# EAGLE board GrapherBlank2 (EAGLE 5.10)
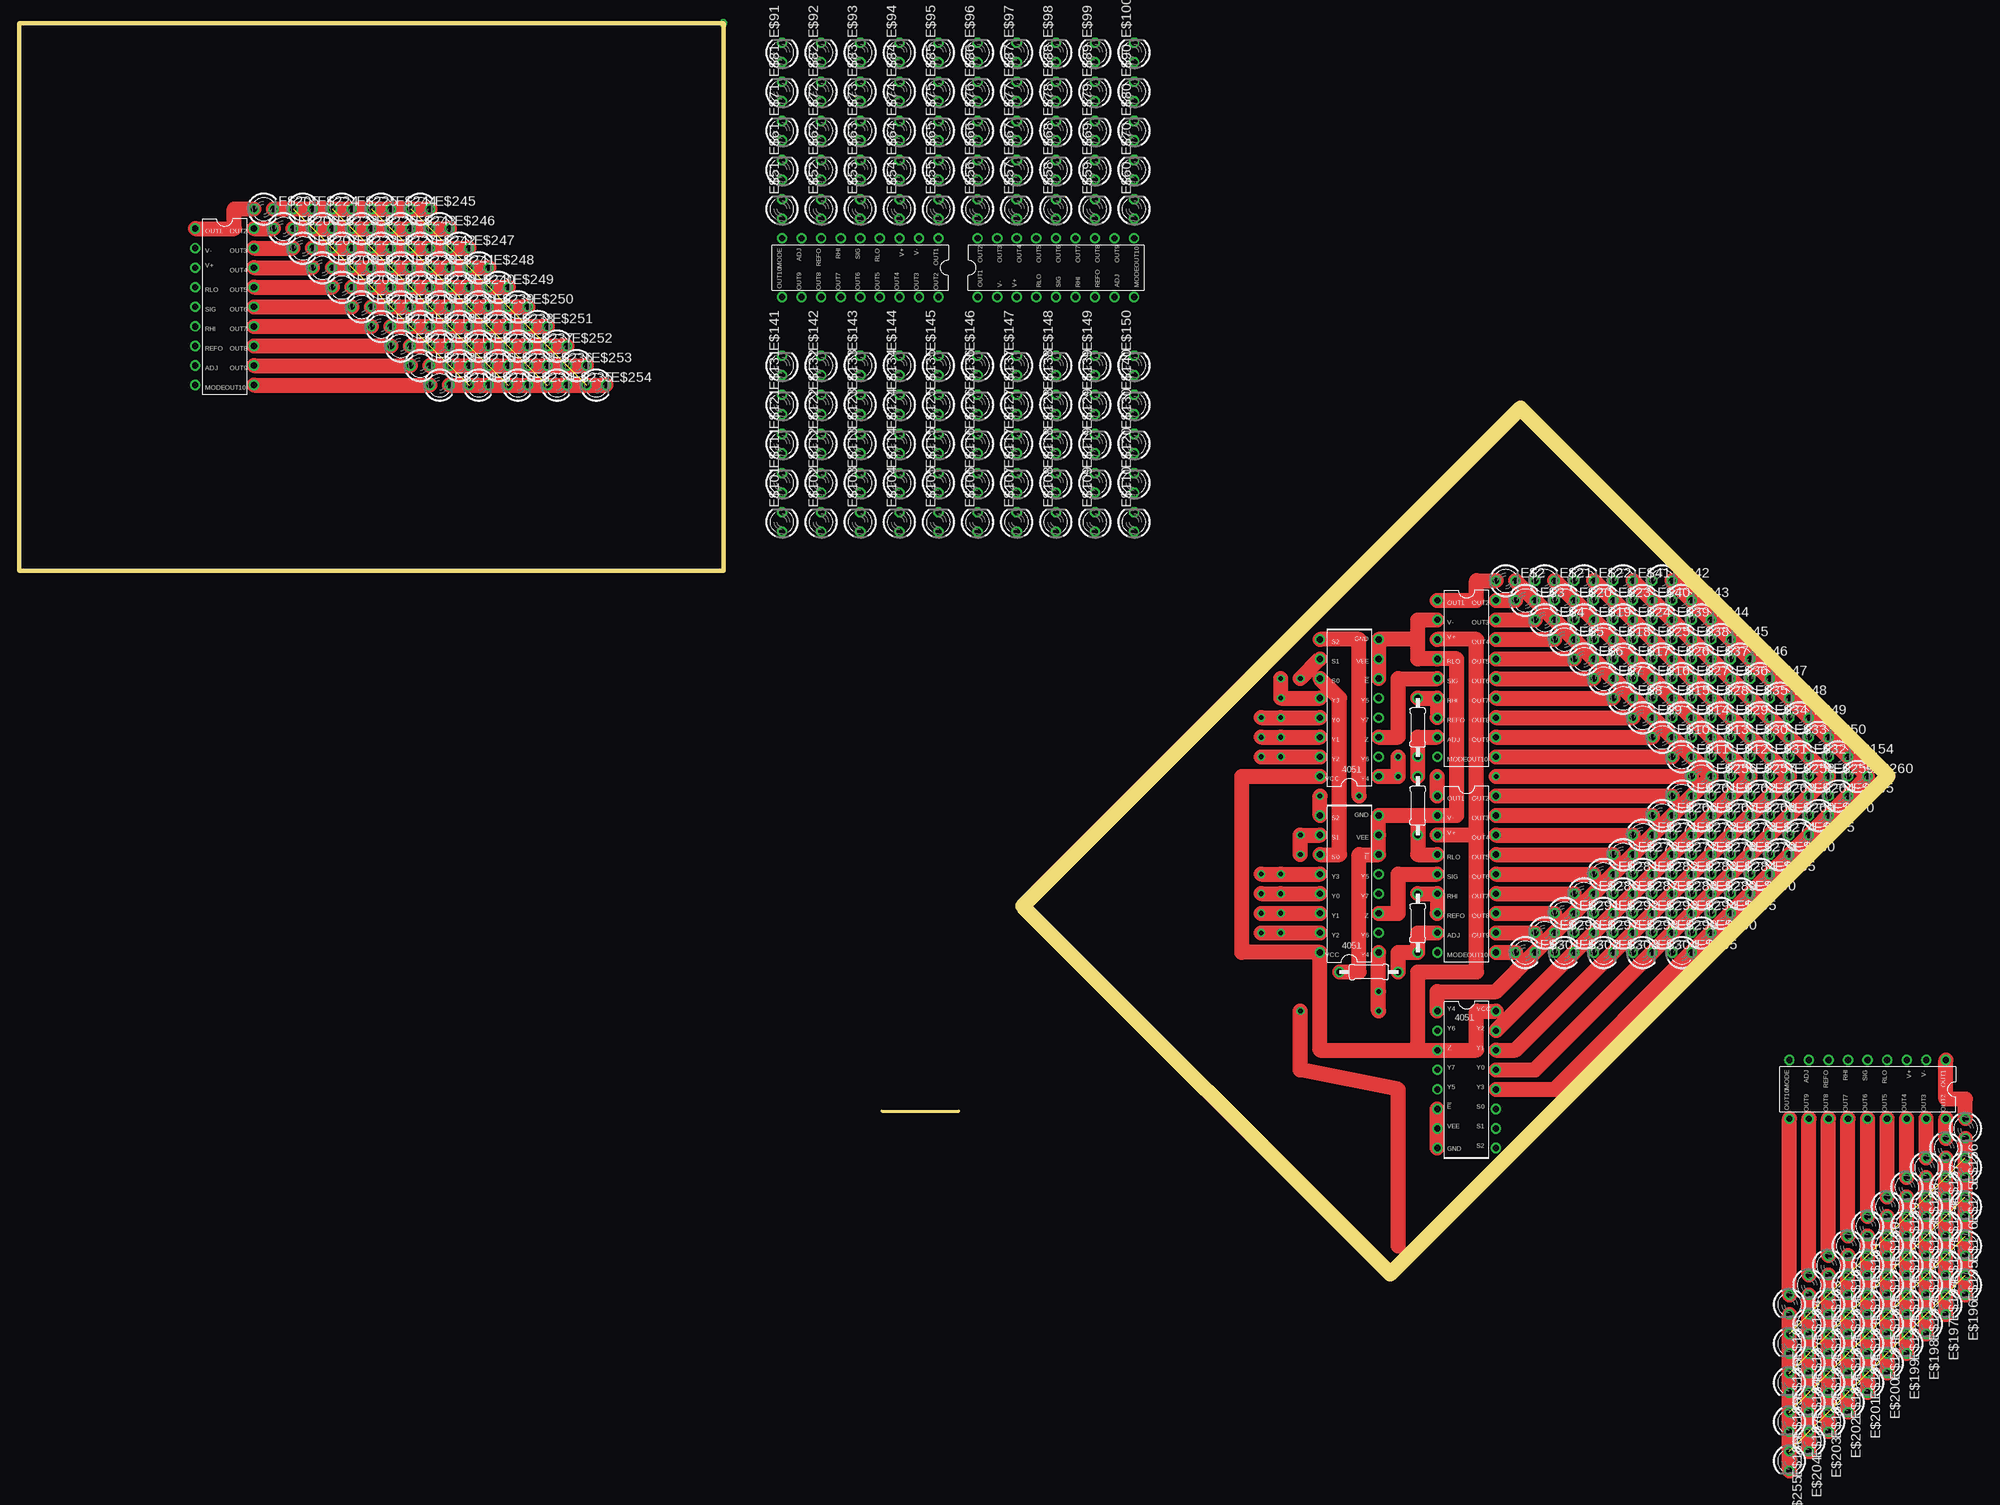
[diagram p0: board, top side]
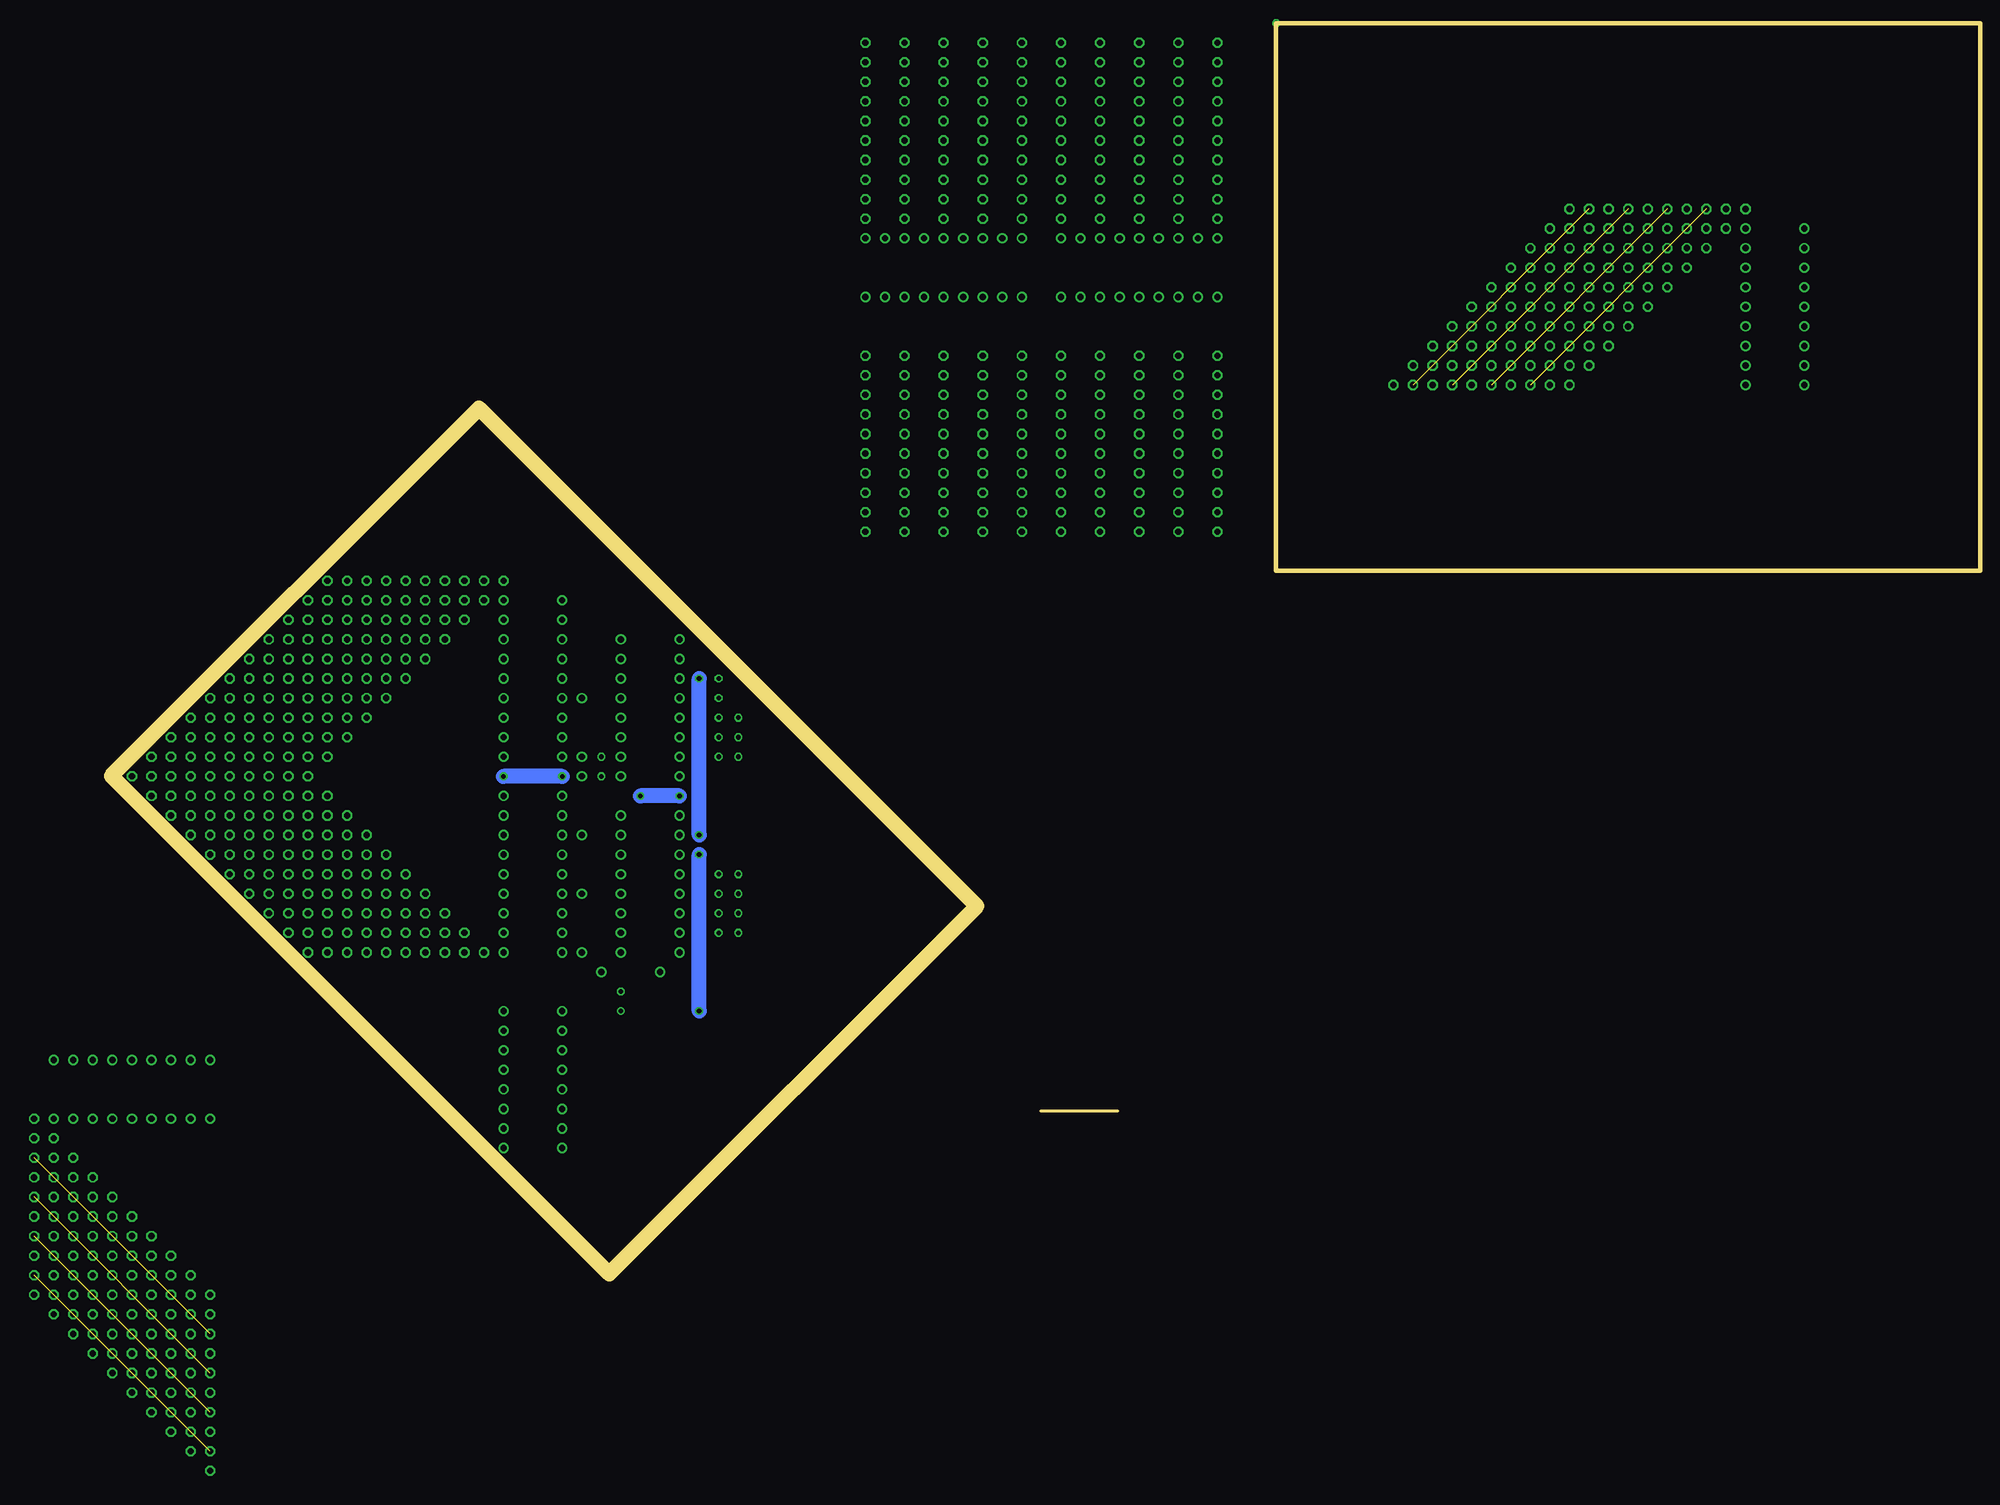
[diagram p1: board, bottom side, seen from below]

Size 242.7 x 162.38 mm. Coordinates in mm from the lower left corner, seen from the top.
Outline: 91.44,91.26 91.44,162.38 0,162.38 0,91.26 91.44,91.26
Outline: 242.7,64.66 194.95,112.41 130.29,47.75 178.04,0 242.7,64.66
Copper layers (1*16): Top 0.035mm / dielectric 1.5mm / Bottom 0.035mm
Design rules "default": minimum track width 10mil, minimum drill 24mil, track to track 8mil, track to pad 8mil, pad to pad 8mil, via to via 8mil, smd to smd 8mil, copper to edge 40mil, drill to drill 8mil, minimum pad ring 10mil, minimum via ring 8mil, stop-mask expansion 4mil, vias tented up to drill 0mil, thermal gap 10mil
Milling: 1 lines

## Footprints (pad centres in the part's own frame; a part is rotated, then mirrored left to right if it is on the bottom)
LM3914-10LED-BARGRAPH = drill 0.813 round: 1!R -3.81,1.27; 1!S -3.81,3.81; 1Q 3.81,1.27; 2!R -3.81,-3.81; 2!S -3.81,-6.35; 2Q 3.81,-8.89; 2Q1 3.81,-11.43; 2Q3 -3.81,-11.43; 3!R 3.81,-1.27; 3!S 3.81,-3.81; 3Q 3.81,-6.35; 4!R 3.81,3.81; 4!S 3.81,6.35; 4Q -3.81,8.89; GND -3.81,-8.89; NC -3.81,6.35; OE -3.81,-1.27; VCC 3.81,8.89
LED3MM = drill 0.813 octagon: A -1.27,0; K 1.27,0
4051-ANALOG-MUX = drill 0.813 round: CLOCK 3.81,-6.35; GND -3.81,-8.89; Q0 3.81,-8.89; Q1 -3.81,-6.35; Q2 -3.81,-3.81; Q3 -3.81,-1.27; Q4 -3.81,3.81; Q5 -3.81,6.35; Q6 -3.81,1.27; Q7 3.81,1.27; Q8 3.81,-1.27; Q9 3.81,3.81; Q10 3.81,6.35; Q11 -3.81,8.89; RESET 3.81,-3.81; VCC 3.81,8.89
RESISTOR = drill 0.813 round: IN1 -3.81,0; IN2 3.81,0

## Placement (x,y rotation side)
E$1  [LM3914-10LED-BARGRAPH]  187.96,78.56 0 top
E$2  [LED3MM]  193.04,89.99 0 top
E$3  [LED3MM]  195.58,87.45 0 top
E$4  [LED3MM]  198.12,84.91 0 top
E$5  [LED3MM]  200.66,82.37 0 top
E$6  [LED3MM]  203.2,79.83 0 top
E$7  [LED3MM]  205.74,77.29 0 top
E$8  [LED3MM]  208.28,74.75 0 top
E$9  [LED3MM]  210.82,72.21 0 top
E$10  [LED3MM]  213.36,69.67 0 top
E$11  [LED3MM]  215.9,67.13 0 top
E$12  [LED3MM]  220.98,67.13 0 top
E$13  [LED3MM]  218.44,69.67 0 top
E$14  [LED3MM]  215.9,72.21 0 top
E$15  [LED3MM]  213.36,74.75 0 top
E$16  [LED3MM]  210.82,77.29 0 top
E$17  [LED3MM]  208.28,79.83 0 top
E$18  [LED3MM]  205.74,82.37 0 top
E$19  [LED3MM]  203.2,84.91 0 top
E$20  [LED3MM]  200.66,87.45 0 top
E$21  [LED3MM]  198.12,89.99 0 top
E$22  [LED3MM]  203.2,89.99 0 top
E$23  [LED3MM]  205.74,87.45 0 top
E$24  [LED3MM]  208.28,84.91 0 top
E$25  [LED3MM]  210.82,82.37 0 top
E$26  [LED3MM]  213.36,79.83 0 top
E$27  [LED3MM]  215.9,77.29 0 top
E$28  [LED3MM]  218.44,74.75 0 top
E$29  [LED3MM]  220.98,72.21 0 top
E$30  [LED3MM]  223.52,69.67 0 top
E$31  [LED3MM]  226.06,67.13 0 top
E$32  [LED3MM]  231.14,67.13 0 top
E$33  [LED3MM]  228.6,69.67 0 top
E$34  [LED3MM]  226.06,72.21 0 top
E$35  [LED3MM]  223.52,74.75 0 top
E$36  [LED3MM]  220.98,77.29 0 top
E$37  [LED3MM]  218.44,79.83 0 top
E$38  [LED3MM]  215.9,82.37 0 top
E$39  [LED3MM]  213.36,84.91 0 top
E$40  [LED3MM]  210.82,87.45 0 top
E$41  [LED3MM]  208.28,89.99 0 top
E$42  [LED3MM]  213.36,89.99 0 top
E$43  [LED3MM]  215.9,87.45 0 top
E$44  [LED3MM]  218.44,84.91 0 top
E$45  [LED3MM]  220.98,82.37 0 top
E$46  [LED3MM]  223.52,79.83 0 top
E$47  [LED3MM]  226.06,77.29 0 top
E$48  [LED3MM]  228.6,74.75 0 top
E$49  [LED3MM]  231.14,72.21 0 top
E$50  [LED3MM]  233.68,69.67 0 top
E$51  [LED3MM]  99.06,138.25 90 top
E$52  [LED3MM]  104.14,138.25 90 top
E$53  [LED3MM]  109.22,138.25 90 top
E$54  [LED3MM]  114.3,138.25 90 top
E$55  [LED3MM]  119.38,138.25 90 top
E$56  [LED3MM]  124.46,138.25 90 top
E$57  [LED3MM]  129.54,138.25 90 top
E$58  [LED3MM]  134.62,138.25 90 top
E$59  [LED3MM]  139.7,138.25 90 top
E$60  [LED3MM]  144.78,138.25 90 top
E$61  [LED3MM]  99.06,143.33 90 top
E$62  [LED3MM]  104.14,143.33 90 top
E$63  [LED3MM]  109.22,143.33 90 top
E$64  [LED3MM]  114.3,143.33 90 top
E$65  [LED3MM]  119.38,143.33 90 top
E$66  [LED3MM]  124.46,143.33 90 top
E$67  [LED3MM]  129.54,143.33 90 top
E$68  [LED3MM]  134.62,143.33 90 top
E$69  [LED3MM]  139.7,143.33 90 top
E$70  [LED3MM]  144.78,143.33 90 top
E$71  [LED3MM]  99.06,148.41 90 top
E$72  [LED3MM]  104.14,148.41 90 top
E$73  [LED3MM]  109.22,148.41 90 top
E$74  [LED3MM]  114.3,148.41 90 top
E$75  [LED3MM]  119.38,148.41 90 top
E$76  [LED3MM]  124.46,148.41 90 top
E$77  [LED3MM]  129.54,148.41 90 top
E$78  [LED3MM]  134.62,148.41 90 top
E$79  [LED3MM]  139.7,148.41 90 top
E$80  [LED3MM]  144.78,148.41 90 top
E$81  [LED3MM]  99.06,153.49 90 top
E$82  [LED3MM]  104.14,153.49 90 top
E$83  [LED3MM]  109.22,153.49 90 top
E$84  [LED3MM]  114.3,153.49 90 top
E$85  [LED3MM]  119.38,153.49 90 top
E$86  [LED3MM]  124.46,153.49 90 top
E$87  [LED3MM]  129.54,153.49 90 top
E$88  [LED3MM]  134.62,153.49 90 top
E$89  [LED3MM]  139.7,153.49 90 top
E$90  [LED3MM]  144.78,153.49 90 top
E$91  [LED3MM]  99.06,158.57 90 top
E$92  [LED3MM]  104.14,158.57 90 top
E$93  [LED3MM]  109.22,158.57 90 top
E$94  [LED3MM]  114.3,158.57 90 top
E$95  [LED3MM]  119.38,158.57 90 top
E$96  [LED3MM]  124.46,158.57 90 top
E$97  [LED3MM]  129.54,158.57 90 top
E$98  [LED3MM]  134.62,158.57 90 top
E$99  [LED3MM]  139.7,158.57 90 top
E$100  [LED3MM]  144.78,158.57 90 top
E$101  [LED3MM]  99.06,97.61 90 top
E$102  [LED3MM]  104.14,97.61 90 top
E$103  [LED3MM]  109.22,97.61 90 top
E$104  [LED3MM]  114.3,97.61 90 top
E$105  [LED3MM]  119.38,97.61 90 top
E$106  [LED3MM]  124.46,97.61 90 top
E$107  [LED3MM]  129.54,97.61 90 top
E$108  [LED3MM]  134.62,97.61 90 top
E$109  [LED3MM]  139.7,97.61 90 top
E$110  [LED3MM]  144.78,97.61 90 top
E$111  [LED3MM]  99.06,102.69 90 top
E$112  [LED3MM]  104.14,102.69 90 top
E$113  [LED3MM]  109.22,102.69 90 top
E$114  [LED3MM]  114.3,102.69 90 top
E$115  [LED3MM]  119.38,102.69 90 top
E$116  [LED3MM]  124.46,102.69 90 top
E$117  [LED3MM]  129.54,102.69 90 top
E$118  [LED3MM]  134.62,102.69 90 top
E$119  [LED3MM]  139.7,102.69 90 top
E$120  [LED3MM]  144.78,102.69 90 top
E$121  [LED3MM]  99.06,107.77 90 top
E$122  [LED3MM]  104.14,107.77 90 top
E$123  [LED3MM]  109.22,107.77 90 top
E$124  [LED3MM]  114.3,107.77 90 top
E$125  [LED3MM]  119.38,107.77 90 top
E$126  [LED3MM]  124.46,107.77 90 top
E$127  [LED3MM]  129.54,107.77 90 top
E$128  [LED3MM]  134.62,107.77 90 top
E$129  [LED3MM]  139.7,107.77 90 top
E$130  [LED3MM]  144.78,107.77 90 top
E$131  [LED3MM]  99.06,112.85 90 top
E$132  [LED3MM]  104.14,112.85 90 top
E$133  [LED3MM]  109.22,112.85 90 top
E$134  [LED3MM]  114.3,112.85 90 top
E$135  [LED3MM]  119.38,112.85 90 top
E$136  [LED3MM]  124.46,112.85 90 top
E$137  [LED3MM]  129.54,112.85 90 top
E$138  [LED3MM]  134.62,112.85 90 top
E$139  [LED3MM]  139.7,112.85 90 top
E$140  [LED3MM]  144.78,112.85 90 top
E$141  [LED3MM]  99.06,117.93 90 top
E$142  [LED3MM]  104.14,117.93 90 top
E$143  [LED3MM]  109.22,117.93 90 top
E$144  [LED3MM]  114.3,117.93 90 top
E$145  [LED3MM]  119.38,117.93 90 top
E$146  [LED3MM]  124.46,117.93 90 top
E$147  [LED3MM]  129.54,117.93 90 top
E$148  [LED3MM]  134.62,117.93 90 top
E$149  [LED3MM]  139.7,117.93 90 top
E$150  [LED3MM]  144.78,117.93 90 top
E$151  [LM3914-10LED-BARGRAPH]  133.35,130.63 90 top
E$152  [LM3914-10LED-BARGRAPH]  110.49,130.63 270 top
E$153  [LM3914-10LED-BARGRAPH]  26.67,126.82 0 top
E$154  [LED3MM]  236.22,67.13 0 top
E$155  [LM3914-10LED-BARGRAPH]  241.3,23.95 270 top
E$156  [LED3MM]  252.73,18.87 270 top  (outside the outline)
E$157  [LED3MM]  250.19,16.33 270 top  (outside the outline)
E$158  [LED3MM]  247.65,13.79 270 top  (outside the outline)
E$159  [LED3MM]  245.11,11.25 270 top
E$160  [LED3MM]  242.57,8.71 270 top
E$161  [LED3MM]  240.03,6.17 270 top
E$162  [LED3MM]  237.49,3.63 270 top
E$163  [LED3MM]  234.95,1.09 270 top
E$164  [LED3MM]  232.41,-1.45 270 top
E$165  [LED3MM]  229.87,-3.99 270 top
E$166  [LED3MM]  229.87,-9.07 270 top  (outside the outline)
E$167  [LED3MM]  232.41,-6.53 270 top  (outside the outline)
E$168  [LED3MM]  234.95,-3.99 270 top
E$169  [LED3MM]  237.49,-1.45 270 top
E$170  [LED3MM]  240.03,1.09 270 top
E$171  [LED3MM]  242.57,3.63 270 top
E$172  [LED3MM]  245.11,6.17 270 top
E$173  [LED3MM]  247.65,8.71 270 top  (outside the outline)
E$174  [LED3MM]  250.19,11.25 270 top  (outside the outline)
E$175  [LED3MM]  252.73,13.79 270 top  (outside the outline)
E$176  [LED3MM]  252.73,8.71 270 top  (outside the outline)
E$177  [LED3MM]  250.19,6.17 270 top  (outside the outline)
E$178  [LED3MM]  247.65,3.63 270 top  (outside the outline)
E$179  [LED3MM]  245.11,1.09 270 top
E$180  [LED3MM]  242.57,-1.45 270 top
E$181  [LED3MM]  240.03,-3.99 270 top
E$182  [LED3MM]  237.49,-6.53 270 top  (outside the outline)
E$183  [LED3MM]  234.95,-9.07 270 top  (outside the outline)
E$184  [LED3MM]  232.41,-11.61 270 top  (outside the outline)
E$185  [LED3MM]  229.87,-14.15 270 top  (outside the outline)
E$186  [LED3MM]  229.87,-19.23 270 top  (outside the outline)
E$187  [LED3MM]  232.41,-16.69 270 top  (outside the outline)
E$188  [LED3MM]  234.95,-14.15 270 top  (outside the outline)
E$189  [LED3MM]  237.49,-11.61 270 top  (outside the outline)
E$190  [LED3MM]  240.03,-9.07 270 top  (outside the outline)
E$191  [LED3MM]  242.57,-6.53 270 top  (outside the outline)
E$192  [LED3MM]  245.11,-3.99 270 top
E$193  [LED3MM]  247.65,-1.45 270 top  (outside the outline)
E$194  [LED3MM]  250.19,1.09 270 top  (outside the outline)
E$195  [LED3MM]  252.73,3.63 270 top  (outside the outline)
E$196  [LED3MM]  252.73,-1.45 270 top  (outside the outline)
E$197  [LED3MM]  250.19,-3.99 270 top  (outside the outline)
E$198  [LED3MM]  247.65,-6.53 270 top  (outside the outline)
E$199  [LED3MM]  245.11,-9.07 270 top  (outside the outline)
E$200  [LED3MM]  242.57,-11.61 270 top  (outside the outline)
E$201  [LED3MM]  240.03,-14.15 270 top  (outside the outline)
E$202  [LED3MM]  237.49,-16.69 270 top  (outside the outline)
E$203  [LED3MM]  234.95,-19.23 270 top  (outside the outline)
E$204  [LED3MM]  232.41,-21.77 270 top  (outside the outline)
E$205  [LED3MM]  31.75,138.25 0 top
E$206  [LED3MM]  34.29,135.71 0 top
E$207  [LED3MM]  36.83,133.17 0 top
E$208  [LED3MM]  39.37,130.63 0 top
E$209  [LED3MM]  41.91,128.09 0 top
E$210  [LED3MM]  44.45,125.55 0 top
E$211  [LED3MM]  46.99,123.01 0 top
E$212  [LED3MM]  49.53,120.47 0 top
E$213  [LED3MM]  52.07,117.93 0 top
E$214  [LED3MM]  54.61,115.39 0 top
E$215  [LED3MM]  59.69,115.39 0 top
E$216  [LED3MM]  57.15,117.93 0 top
E$217  [LED3MM]  54.61,120.47 0 top
E$218  [LED3MM]  52.07,123.01 0 top
E$219  [LED3MM]  49.53,125.55 0 top
E$220  [LED3MM]  46.99,128.09 0 top
E$221  [LED3MM]  44.45,130.63 0 top
E$222  [LED3MM]  41.91,133.17 0 top
E$223  [LED3MM]  39.37,135.71 0 top
E$224  [LED3MM]  36.83,138.25 0 top
E$225  [LED3MM]  41.91,138.25 0 top
E$226  [LED3MM]  44.45,135.71 0 top
E$227  [LED3MM]  46.99,133.17 0 top
E$228  [LED3MM]  49.53,130.63 0 top
E$229  [LED3MM]  52.07,128.09 0 top
E$230  [LED3MM]  54.61,125.55 0 top
E$231  [LED3MM]  57.15,123.01 0 top
E$232  [LED3MM]  59.69,120.47 0 top
E$233  [LED3MM]  62.23,117.93 0 top
E$234  [LED3MM]  64.77,115.39 0 top
E$235  [LED3MM]  69.85,115.39 0 top
E$236  [LED3MM]  67.31,117.93 0 top
E$237  [LED3MM]  64.77,120.47 0 top
E$238  [LED3MM]  62.23,123.01 0 top
E$239  [LED3MM]  59.69,125.55 0 top
E$240  [LED3MM]  57.15,128.09 0 top
E$241  [LED3MM]  54.61,130.63 0 top
E$242  [LED3MM]  52.07,133.17 0 top
E$243  [LED3MM]  49.53,135.71 0 top
E$244  [LED3MM]  46.99,138.25 0 top
E$245  [LED3MM]  52.07,138.25 0 top
E$246  [LED3MM]  54.61,135.71 0 top
E$247  [LED3MM]  57.15,133.17 0 top
E$248  [LED3MM]  59.69,130.63 0 top
E$249  [LED3MM]  62.23,128.09 0 top
E$250  [LED3MM]  64.77,125.55 0 top
E$251  [LED3MM]  67.31,123.01 0 top
E$252  [LED3MM]  69.85,120.47 0 top
E$253  [LED3MM]  72.39,117.93 0 top
E$254  [LED3MM]  74.93,115.39 0 top
E$255  [LED3MM]  229.87,-24.31 270 top  (outside the outline)
E$256  [LED3MM]  218.44,64.59 0 top
E$257  [LED3MM]  223.52,64.59 0 top
E$258  [LED3MM]  228.6,64.59 0 top
E$259  [LED3MM]  233.68,64.59 0 top
E$260  [LED3MM]  238.76,64.59 0 top
E$261  [LED3MM]  215.9,62.05 0 top
E$262  [LED3MM]  220.98,62.05 0 top
E$263  [LED3MM]  226.06,62.05 0 top
E$264  [LED3MM]  231.14,62.05 0 top
E$265  [LED3MM]  236.22,62.05 0 top
E$266  [LED3MM]  213.36,59.51 0 top
E$267  [LED3MM]  218.44,59.51 0 top
E$268  [LED3MM]  223.52,59.51 0 top
E$269  [LED3MM]  228.6,59.51 0 top
E$270  [LED3MM]  233.68,59.51 0 top
E$271  [LED3MM]  210.82,56.97 0 top
E$272  [LED3MM]  215.9,56.97 0 top
E$273  [LED3MM]  220.98,56.97 0 top
E$274  [LED3MM]  226.06,56.97 0 top
E$275  [LED3MM]  231.14,56.97 0 top
E$276  [LED3MM]  208.28,54.43 0 top
E$277  [LED3MM]  213.36,54.43 0 top
E$278  [LED3MM]  218.44,54.43 0 top
E$279  [LED3MM]  223.52,54.43 0 top
E$280  [LED3MM]  228.6,54.43 0 top
E$281  [LED3MM]  205.74,51.89 0 top
E$282  [LED3MM]  210.82,51.89 0 top
E$283  [LED3MM]  215.9,51.89 0 top
E$284  [LED3MM]  220.98,51.89 0 top
E$285  [LED3MM]  226.06,51.89 0 top
E$286  [LED3MM]  203.2,49.35 0 top
E$287  [LED3MM]  208.28,49.35 0 top
E$288  [LED3MM]  213.36,49.35 0 top
E$289  [LED3MM]  218.44,49.35 0 top
E$290  [LED3MM]  223.52,49.35 0 top
E$291  [LED3MM]  200.66,46.81 0 top
E$292  [LED3MM]  205.74,46.81 0 top
E$293  [LED3MM]  210.82,46.81 0 top
E$294  [LED3MM]  215.9,46.81 0 top
E$295  [LED3MM]  220.98,46.81 0 top
E$296  [LED3MM]  198.12,44.27 0 top
E$297  [LED3MM]  203.2,44.27 0 top
E$298  [LED3MM]  208.28,44.27 0 top
E$299  [LED3MM]  213.36,44.27 0 top
E$300  [LED3MM]  218.44,44.27 0 top
E$301  [LED3MM]  195.58,41.73 0 top
E$302  [LED3MM]  200.66,41.73 0 top
E$303  [LED3MM]  205.74,41.73 0 top
E$304  [LED3MM]  210.82,41.73 0 top
E$305  [LED3MM]  215.9,41.73 0 top
E$306  [LM3914-10LED-BARGRAPH]  187.96,53.16 0 top
E$307  [4051-ANALOG-MUX]  172.72,50.62 180 top
E$308  [RESISTOR]  181.61,45.54 90 top
E$309  [RESISTOR]  175.26,39.19 0 top
E$310  [RESISTOR]  181.61,70.94 90 top
E$311  [RESISTOR]  181.61,60.78 90 top
E$312  [4051-ANALOG-MUX]  172.72,73.48 180 top
E$329  [4051-ANALOG-MUX]  187.96,25.22 0 top

## Library data of the parts
E$1 E$151-E$153 E$155 E$306-E$312 E$329 = RussellLibrary
E$2-E$150 E$154 E$156-E$305 = led

## Nets
GND: E$1.1!R E$1.NC E$306.1!R E$306.NC E$307.GND E$307.Q1 E$307.Q2 E$309.IN1 E$311.IN1 E$312.GND E$312.Q1 E$312.Q2
S$1: E$153.VCC E$206.A
S$2: E$153.4Q E$205.A
S$3: E$213.K E$216.K E$233.K E$236.K E$253.K
S$4: E$214.K E$254.K
S$5: E$212.K E$252.K
S$6: E$153.4!S E$207.A
S$7: E$153.4!R E$208.A
S$8: E$153.1Q E$209.A
S$9: E$153.3!R E$210.A
S$10: E$153.2Q1 E$214.A
S$11: E$153.2Q E$213.A
S$12: E$153.3Q E$212.A
S$13: E$153.3!S E$211.A
S$16: E$307.Q11
S$17: E$1.1!S E$306.1!S E$307.VCC E$312.VCC E$329.VCC
S$18: E$312.Q11
S$20: E$211.K E$251.K
S$21: E$210.K E$250.K
S$22: E$306.OE E$307.Q4
S$23: E$306.2!R E$306.2!S E$308.IN2
S$24: E$306.GND E$308.IN1 E$309.IN2
S$26: E$2.K E$256.K E$301.K E$329.Q11
S$27: E$21.K E$257.K E$302.K E$329.Q10
S$28: E$1.2!R E$1.2!S E$310.IN2
S$29: E$209.K E$249.K
S$30: E$208.K E$248.K
S$31: E$207.K E$247.K
S$32: E$206.K E$246.K
S$33: E$205.K E$245.K
S$34: E$245.A E$254.A
S$35: E$235.A E$244.A
S$36: E$225.A E$234.A
S$37: E$1.GND E$310.IN1 E$311.IN2
S$38: E$1.OE E$312.Q4
S$39: E$307.Q0 E$312.Q0
S$40: E$1.VCC E$3.A
S$41: E$1.4Q E$2.A
S$42: E$215.A E$224.A
S$43: E$1.4!S E$4.A
S$44: E$1.4!R E$5.A
S$45: E$1.1Q E$6.A
S$46: E$1.3!R E$7.A
S$47: E$1.2Q1 E$11.A
S$48: E$1.2Q E$10.A
S$49: E$1.3Q E$9.A
S$50: E$1.3!S E$8.A
S$51: E$164.K E$167.K E$184.K E$187.K E$204.K
S$52: E$165.K E$255.K
S$53: E$163.K E$203.K
S$54: E$162.K E$202.K
S$55: E$161.K E$201.K
S$56: E$160.K E$200.K
S$57: E$159.K E$199.K
S$58: E$158.K E$198.K
S$59: E$157.K E$197.K
S$60: E$156.K E$196.K
S$61: E$196.A E$255.A
S$62: E$186.A E$195.A
S$63: E$176.A E$185.A
S$64: E$166.A E$175.A
S$65: E$155.VCC E$157.A
S$66: E$155.4Q E$156.A
S$67: E$155.4!S E$158.A
S$68: E$155.4!R E$159.A
S$69: E$155.1Q E$160.A
S$70: E$155.3!R E$161.A
S$71: E$155.2Q1 E$165.A
S$72: E$155.2Q E$164.A
S$73: E$155.3Q E$163.A
S$74: E$155.3!S E$162.A
S$75: E$22.K E$258.K E$303.K E$329.Q9
S$76: E$260.A
S$77: E$259.A
S$78: E$258.A
S$79: E$257.A
S$80: E$41.K E$259.K E$304.K E$329.Q7
S$81: E$42.K E$260.K E$305.K E$329.Q8
S$82: E$265.A
S$83: E$264.A
S$84: E$263.A
S$85: E$262.A
S$86: E$261.A
S$88: E$270.A
S$89: E$269.A
S$90: E$268.A
S$91: E$267.A
S$92: E$266.A
S$94: E$275.A
S$95: E$274.A
S$96: E$273.A
S$97: E$272.A
S$98: E$271.A
S$100: E$280.A
S$101: E$279.A
S$102: E$278.A
S$103: E$277.A
S$104: E$276.A
S$106: E$285.A
S$107: E$284.A
S$108: E$283.A
S$109: E$282.A
S$110: E$281.A
S$111: E$307.RESET E$312.RESET
S$112: E$290.A
S$113: E$289.A
S$114: E$288.A
S$115: E$287.A
S$116: E$286.A
S$118: E$295.A
S$119: E$294.A
S$120: E$293.A
S$121: E$292.A
S$122: E$291.A
S$123: E$307.CLOCK E$312.CLOCK
S$124: E$300.A
S$125: E$299.A
S$126: E$298.A
S$127: E$297.A
S$128: E$296.A
S$129: E$312.Q8
S$130: E$305.A
S$131: E$304.A
S$132: E$303.A
S$133: E$302.A
S$134: E$301.A
S$135: E$256.A E$306.4Q
S$138: E$312.Q7
S$139: E$312.Q9
S$140: E$312.Q10
S$141: E$307.Q10
S$142: E$307.Q9
S$143: E$307.Q7
S$144: E$307.Q8
S$158: E$329.GND E$329.Q1 E$329.Q2

## Tracks (layer width: path | path; a pad name or v marks a point on that pad's centre or on a via)
GND
  Top 1.93: E$312.Q2 E$312.Q1 E$312.GND 181.61,82.37 | E$1.NC 181.61,84.91 181.61,82.37 | 181.61,82.37 181.61,79.83 E$1.1!R 186.69,79.83 186.69,59.51 E$306.NC 181.61,59.51 | 181.61,59.51 E$307.GND E$307.Q1 E$307.Q2 173.99,54.43 173.99,39.19 E$309.IN1 | 181.61,59.51 E$311.IN1 181.61,54.43 E$306.1!R
S$1
  Top 1.93: E$153.VCC E$206.A
S$2
  Top 1.93: E$205.A 27.94,138.25 27.94,135.71 E$153.4Q
S$3
  Top 1.93: E$213.K E$216.K E$233.K E$236.K E$253.K
S$4
  Top 1.93: E$214.K E$254.K
S$5
  Top 1.93: E$212.K E$252.K
S$6
  Top 1.93: E$153.4!S E$207.A
S$7
  Top 1.93: E$153.4!R E$208.A
S$8
  Top 1.93: E$153.1Q E$209.A
S$9
  Top 1.93: E$153.3!R E$210.A
S$10
  Top 1.93: E$153.2Q1 E$214.A
S$11
  Top 1.93: E$153.2Q E$213.A
S$12
  Top 1.93: E$153.3Q E$212.A
S$13
  Top 1.93: E$153.3!S E$211.A
S$14  (via drill 0.6)
  other vias: 194.95,112.41
S$16  (via drill 0.6)
  Top 1.93: E$307.Q11 v176.53,36.65 v176.53,34.11
S$17
  Top 1.93: E$1.1!S 189.23,82.37 189.23,56.97 | 189.23,56.97 E$306.1!S | 189.23,56.97 189.23,39.19 181.61,39.19 181.61,29.03 | 181.61,29.03 168.91,29.03 E$307.VCC 158.75,41.73 158.75,64.59 E$312.VCC | 181.61,29.03 189.23,29.03 189.23,34.11 E$329.VCC
S$18  (via drill 0.6)
  Top 1.93: E$312.Q11 v179.07,64.59 v179.07,67.13
S$20
  Top 1.93: E$211.K E$251.K
S$21
  Top 1.93: E$210.K E$250.K
S$22
  Top 1.93: E$307.Q4 179.07,46.81 179.07,51.89 E$306.OE
S$23
  Top 1.93: E$308.IN2 E$306.2!R E$306.2!S
S$24
  Top 1.93: E$306.GND 181.61,44.27 E$308.IN1 179.07,41.73 E$309.IN2
S$25  (via drill 0.6)
  other vias: 91.44,162.38
S$26
  Top 1.93: E$329.Q11 184.15,36.65 191.77,36.65 E$301.K E$256.K E$2.K
S$27
  Top 1.93: E$21.K E$257.K E$302.K E$329.Q10
S$28
  Top 1.93: E$310.IN2 E$1.2!R E$1.2!S
S$29
  Top 1.93: E$209.K E$249.K
S$30
  Top 1.93: E$208.K E$248.K
S$31
  Top 1.93: E$207.K E$247.K
S$32
  Top 1.93: E$206.K E$246.K
S$33
  Top 1.93: E$205.K E$245.K
S$34  (1 unrouted)
S$35  (1 unrouted)
S$36  (1 unrouted)
S$37
  Top 1.93: E$1.GND 181.61,69.67 E$310.IN1 E$311.IN2
S$38
  Top 1.93: E$1.OE 179.07,77.29 179.07,69.67 E$312.Q4
S$39  (via drill 0.6)
  Top 1.93: E$312.Q0 173.99,82.37 v173.99,62.05 | E$307.Q0 v168.91,62.05
  Bottom 1.93: v168.91,62.05 v173.99,62.05
S$40
  Top 1.93: E$1.VCC E$3.A
S$41
  Top 1.93: E$2.A 189.23,89.99 189.23,87.45 E$1.4Q
S$42  (1 unrouted)
S$43
  Top 1.93: E$1.4!S E$4.A
S$44
  Top 1.93: E$1.4!R E$5.A
S$45
  Top 1.93: E$1.1Q E$6.A
S$46
  Top 1.93: E$1.3!R E$7.A
S$47
  Top 1.93: E$1.2Q1 E$11.A
S$48
  Top 1.93: E$1.2Q E$10.A
S$49
  Top 1.93: E$1.3Q E$9.A
S$50
  Top 1.93: E$1.3!S E$8.A
S$51
  Top 1.93: E$164.K E$167.K E$184.K E$187.K E$204.K
S$52
  Top 1.93: E$255.K E$165.K
S$53
  Top 1.93: E$203.K E$163.K
S$54
  Top 1.93: E$202.K E$162.K
S$55
  Top 1.93: E$201.K E$161.K
S$56
  Top 1.93: E$200.K E$160.K
S$57
  Top 1.93: E$199.K E$159.K
S$58
  Top 1.93: E$198.K E$158.K
S$59
  Top 1.93: E$197.K E$157.K
S$60
  Top 1.93: E$196.K E$156.K
S$61  (1 unrouted)
S$62  (1 unrouted)
S$63  (1 unrouted)
S$64  (1 unrouted)
S$65
  Top 1.93: E$157.A E$155.VCC
S$66
  Top 1.93: E$156.A 252.73,22.68 250.19,22.68 E$155.4Q
S$67
  Top 1.93: E$158.A E$155.4!S
S$68
  Top 1.93: E$159.A E$155.4!R
S$69
  Top 1.93: E$160.A E$155.1Q
S$70
  Top 1.93: E$161.A E$155.3!R
S$71
  Top 1.93: E$165.A E$155.2Q1
S$72
  Top 1.93: E$164.A E$155.2Q
S$73
  Top 1.93: E$163.A E$155.3Q
S$74
  Top 1.93: E$162.A E$155.3!S
S$75
  Top 1.93: E$329.Q9 194.31,29.03 E$303.K E$258.K E$22.K
S$80
  Top 1.93: E$329.Q7 196.85,26.49 E$304.K E$259.K E$41.K
S$81
  Top 1.93: E$329.Q8 199.39,23.95 E$305.K E$260.K E$42.K
S$86
  Top 1.93: 191.77,62.05 E$261.A
S$92
  Top 1.93: 191.77,59.51 E$266.A
S$98
  Top 1.93: 191.77,56.97 E$271.A
S$104
  Top 1.93: 191.77,54.43 E$276.A
S$110
  Top 1.93: 191.77,51.89 E$281.A
S$111
  Top 1.93: E$312.RESET 171.45,74.75 171.45,54.43 E$307.RESET
S$116
  Top 1.93: 191.77,49.35 E$286.A
S$122
  Top 1.93: 191.77,46.81 E$291.A
S$123  (via drill 0.6)
  Top 1.93: v166.37,77.29 E$312.CLOCK | E$307.CLOCK v166.37,56.97 v166.37,54.43 | v166.37,34.11 166.37,26.49 179.07,23.95 179.07,3.63
  Bottom 1.93: v166.37,56.97 v166.37,77.29 | v166.37,34.11 v166.37,54.43
S$128
  Top 1.93: 191.77,44.27 E$296.A
S$129  (via drill 0.6)
  Top 1.93: E$312.Q8 v163.83,74.75 v163.83,77.29
S$134
  Top 1.93: 191.77,41.73 E$301.A
S$135  (via drill 0.6)
  Top 1.93: v191.77,64.59 E$256.A | E$306.4Q v184.15,64.59
  Bottom 1.93: v184.15,64.59 v191.77,64.59
S$138  (via drill 0.6)
  Top 1.93: E$312.Q7 v163.83,72.21 v161.29,72.21
S$139  (via drill 0.6)
  Top 1.93: E$312.Q9 v163.83,69.67 v161.29,69.67
S$140  (via drill 0.6)
  Top 1.93: E$312.Q10 v163.83,67.13 v161.29,67.13
S$141  (via drill 0.6)
  Top 1.93: E$307.Q10 v163.83,44.27 v161.29,44.27
S$142  (via drill 0.6)
  Top 1.93: E$307.Q9 v163.83,46.81 v161.29,46.81
S$143  (via drill 0.6)
  Top 1.93: E$307.Q7 v163.83,49.35 v161.29,49.35
S$144  (via drill 0.6)
  Top 1.93: E$307.Q8 v163.83,51.89 v161.29,51.89
S$158
  Top 1.93: E$329.GND E$329.Q1 E$329.Q2